# Altium PCB PCB.PcbDoc
Units mm, origin at the board's own origin, x right, y up, seen from the top; angles counter-clockwise.
Board outline 16.9 x 18.7 mm, 2 copper layers (Top Layer, Bottom Layer), stack 0.98 mm thick; 2 components, 8 nets, 17 pads, 0 vias.
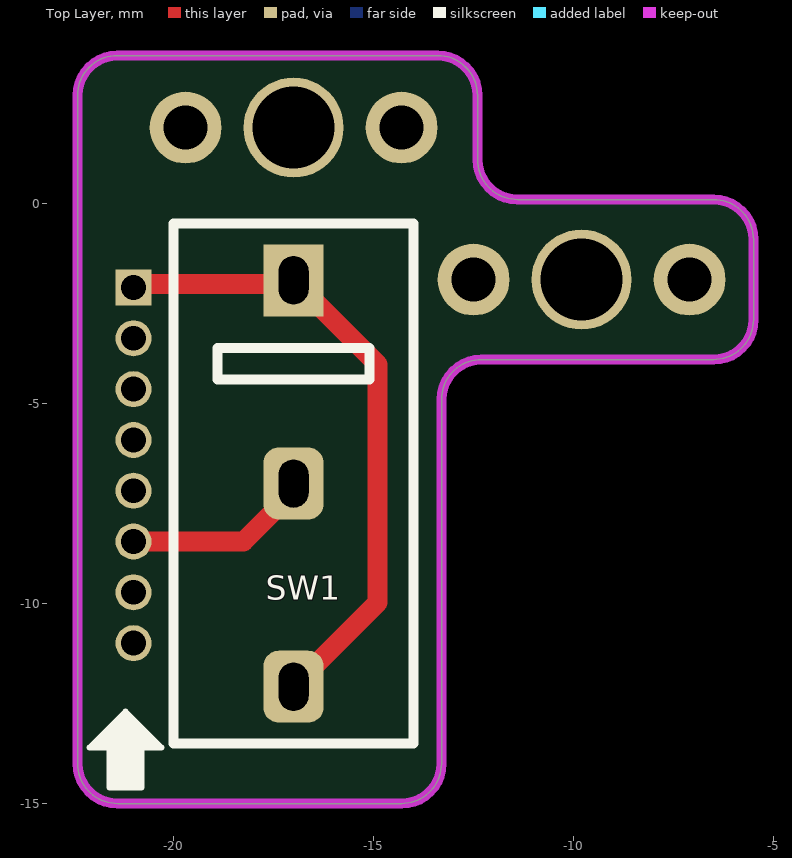
[diagram p0: Top Layer view]
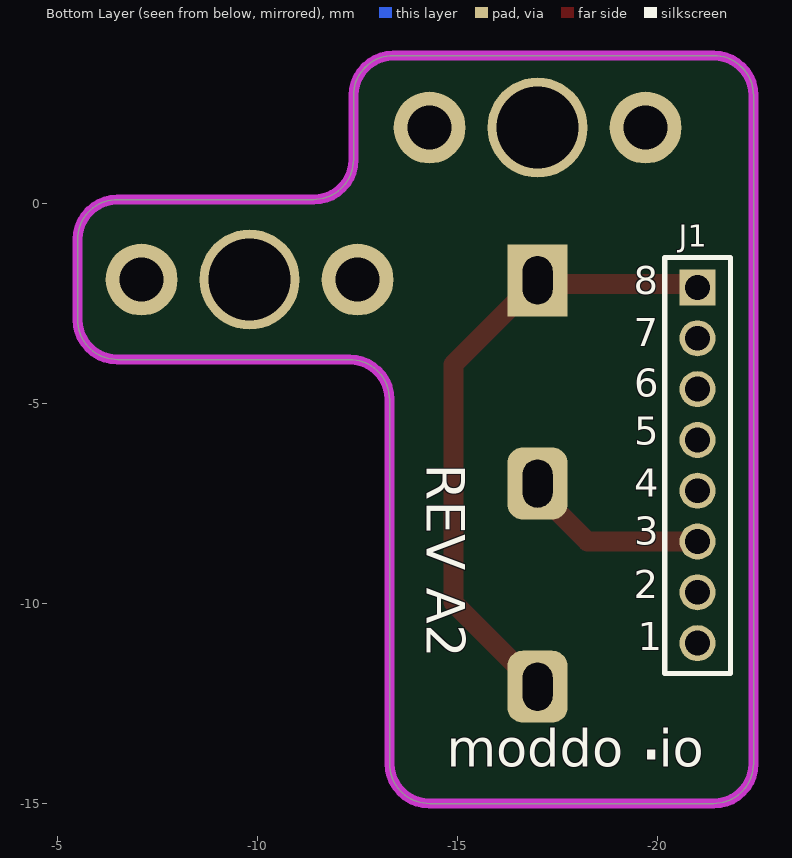
[diagram p1: Bottom Layer view, seen from below]

## Layer stack, top to bottom
Top Solder: solder mask 0.0102, Solder Resist, Dk 3.5
Top Layer: signal copper 0.0356
Dielectric 1: dielectric 0.9086, FR-4, Dk 4.8
Bottom Layer: signal copper 0.0356
Bottom Solder: solder mask 0.0102, Solder Resist, Dk 3.5

## Board outline
-21.4,-15 cw(c-21.4,-14) -22.4,-14 -22.4,2.7 cw(c-21.4,2.7) -21.4,3.7 -13.4,3.7 cw(c-13.4,2.7) -12.4,2.7 -12.4,1.1 ccw(c-11.4,1.1) -11.4,0.1 -6.5,0.1 cw(c-6.5,-0.9) -5.5,-0.9 -5.5,-2.9 cw(c-6.5,-2.9) -6.5,-3.9 -12.3,-3.9 ccw(c-12.3,-4.9) -13.3,-4.9 -13.3,-14 cw(c-14.3,-14) -14.3,-15

## Design rules (kind name [scope] priority, off if disabled: settings)
BoardOutlineClearance [All] p1: gap=0.2 ignorepadtopadclearanceinfootprint=FALSE
Clearance GND_bot [InNamedPolygon('GND_bot')] p1: gap=0.2 ignorepadtopadclearanceinfootprint=FALSE
Clearance GND_top [InNamedPolygon('GND_top')] p2: gap=0.1 ignorepadtopadclearanceinfootprint=FALSE
Clearance [All] p3: gap=0.16 ignorepadtopadclearanceinfootprint=FALSE
HoleSize [All] p1: absolutevalues=TRUE maxlimit=20 minlimit=0.025 maxpercent=80.000 minpercent=20.000
MinimumSolderMaskSliver [All] p1: minsoldermaskwidth=0.05
PolygonConnect [All] p1: thpad.connectstyle=Relief thpad.reliefconductorwidth=0.254 thpad.reliefentries=4 thpad.polygonreliefangle="90 Angle" thpad.airgapwidth=0.1 smdpad.connectstyle=Relief smdpad.reliefconductorwidth=0.254 smdpad.reliefentries=4 smdpad.polygonreliefangle="90 Angle" smdpad.airgapwidth=0.1 via.connectstyle=Direct via.reliefconductorwidth=0.254 via.reliefentries=4 via.polygonreliefangle="90 Angle" via.airgapwidth=0.254
RoutingVias [All] p1: holewidth=0.3 width=0.4 viastyle="Through Hole" minholewidth=0.3 minwidth=0.4 maxholewidth=2 maxwidth=10
SilkToSilkClearance [All] p1: silktosilkclearance=0.01
SilkToSolderMaskClearance [IsPad] p1: minsilkscreentomaskgap=0.001 clearancetoexposedcopper=TRUE
SolderMaskExpansion [All] p1: expansion=0.05 istentingtop=FALSE
SupplyNets "Schematic Supply Nets_1" [InNet('GND')] p1: voltage=0.000
SupplyNets "Schematic Supply Nets" [InNet('VDD_EXP')] p2: voltage=0.000
SupplyNets "Schematic Supply Nets_2" [InNet('VBUS')] p3: voltage=0.000
UnRoutedNet [All] p1: checkbadconnections=TRUE
Width [All] p1: maxlimit=2.54 minlimit=0.089 preferedwidth=0.254
25 further rules are at their usual default settings.

## Components (designator, comment, footprint, x,y, rotation, side; value= is the part's Value field where it differs from the comment)
J1 "1.27mm_8pins" HEADER_MALE_1_27mm_8p_HEIGHT_1mm -21,-2.1 r270 bottom
SW1 "Microswitch" Microswitch -17,-7 r0 top

## Footprints (in the part's own frame and the unit in brackets; to place one, negate y for a bottom-side part, rotate by r counter-clockwise, add the part's x,y. Pads: shape width x height; smd on the part's side, far side on the other; paste and mask are expansions set on the pad)
HEADER_MALE_1_27mm_8p_HEIGHT_1mm [mm]
  rect 0.9x0.9 hole 0.62 mask+0.05: 1(0,0)
  round 0.9 hole 0.62 mask+0.05: 2(1.27,0) 3(2.54,0) 4(3.81,0) 5(5.08,0) 6(6.35,0) 7(7.62,0) 8(8.89,0)
  silkscreen extent -0.75,-0.82 9.65,0.82, body extent -0.83,-0.9 9.73,0.9, height 4.46
Microswitch [mm]
  rect 1.5x1.8 hole 0.75 slot 1.2 at 90 deg mask+0.05: 1(0,5.08)
  rrect50% 1.5x1.8 hole 0.75 slot 1.2 at 90 deg mask+0.05: 2(0,0) 3(0,-5.08)
  silkscreen extent -3,-6.5 3,6.5, body extent -2.88,-6.4 2.88,6.35, height 7.25

## Part data
J1: "1.27mm 1.27mm 1A 1 Gold -40℃~+105℃ 8P Phosphor Bronze Through Hole 1x8P Top 4.3mm Square Hole Through Hole,P=1.27mm Female Headers ROHS"

## Free pads (board coordinates)
  round 1.8 hole 1.1: ""(-19.7,1.9) ""(-14.3,1.9) ""(-12.5,-1.9) ""(-7.1,-1.9)
  round 2.5 hole 2.05: ""(-17,1.9) ""(-9.8,-1.9)

## Nets (pads, with @x,y where several pads share a name; then routed paths per layer and width w, separated by ;. In a path a pad name is that pad's centre, name@x,y a point inside that pad or via, vN(x,y) a via of type N, cw(c..) or ccw(c..) an arc to the next point about the centre after c; other vN are vias at no path point)
BUTTON: J1.7
CLICK_LEFT: J1.6 SW1.2 | length 4.7
  Top Layer w0.5: J1.6 -18.25,-8.45 -17,-7.2 SW1.2
FRONT_DETECT: J1.5
FRONT_GPIO: J1.2
FRONT_INT: J1.3
GND: J1.1 SW1.1 SW1.3 | length 16
  Top Layer w0.5: J1.1 -20.91,-2.01 -17.09,-2.01 SW1.1 -14.9,-4.02 -14.9,-9.98 SW1.3
VBUS: J1.4
VDD_EXP: J1.8

## Keep-outs
Keep-Out Layer:
  the board outline again, w0.254

## Silkscreen, mask and mechanical layers (free items; w line width, h text height)
Top Overlay:
  lines w0.15: -21.9,-13.5 -20.5,-13.5 ; -21.8,-13.4 -20.6,-13.4 ; -21.7,-13.3 -20.7,-13.3 ; -21.6,-14.5 -20.8,-14.5 ; -21.6,-14.4 -20.8,-14.4 ; -21.6,-14.3 -20.8,-14.3 ; -21.6,-14.2 -20.8,-14.2 ; -21.6,-14.1 -20.8,-14.1 ; -21.6,-14 -20.8,-14 ; -21.6,-13.9 -20.8,-13.9 ; -21.6,-13.8 -20.8,-13.8 ; -21.6,-13.7 -20.8,-13.7 ; -21.6,-13.2 -20.8,-13.2 ; -21.5,-13.1 -20.9,-13.1 ; -21.4,-13 -21,-13 ; -21.3,-12.9 -21.1,-12.9 ; -21.2,-13.6 -21.2,-12.8 ; -21.6,-13.6 -20.8,-13.6 ; -21.6,-13.6 -22.1,-13.6 -21.2,-12.7 ; -21.6,-13.6 -21.6,-14.6 -20.8,-14.6 -20.8,-13.6 ; -21.2,-12.7 -20.3,-13.6 -20.8,-13.6 ; -21.2,-12.7 -21.2,-12.7 ; -21.2,-12.7 -21.2,-12.7
Bottom Overlay:
  text "8" at -19.4,-2.5 h1.2
  text "7" at -19.4,-3.8 h1.2
  text "6" at -19.421,-5.068 h1.2
  text "5" at -19.421,-6.268 h1.2
  text "REV A2" at -13.9,-6.5 h1.65 r90
  text "4" at -19.421,-7.568 h1.2
  text "3" at -19.421,-8.768 h1.2
  text "2" at -19.4,-10.1 h1.2
  text "1" at -19.5,-11.4 h1.2
  text "io" at -20.025,-14.395 h1.6
  text "." at -19.525,-14.395 h2.5
  text "moddo" at -14.725,-14.395 h1.6